# Altium PCB clock-temp-touch.PcbDoc
Units mm, origin at the board's own origin, x right, y up, seen from the top; angles counter-clockwise.
Board outline 151 x 86.38 mm, 2 copper layers (Top Layer, Bottom Layer); 57 components, 33 nets, 157 pads, 0 vias.
Unrouted connection lines stored in the file: 42.
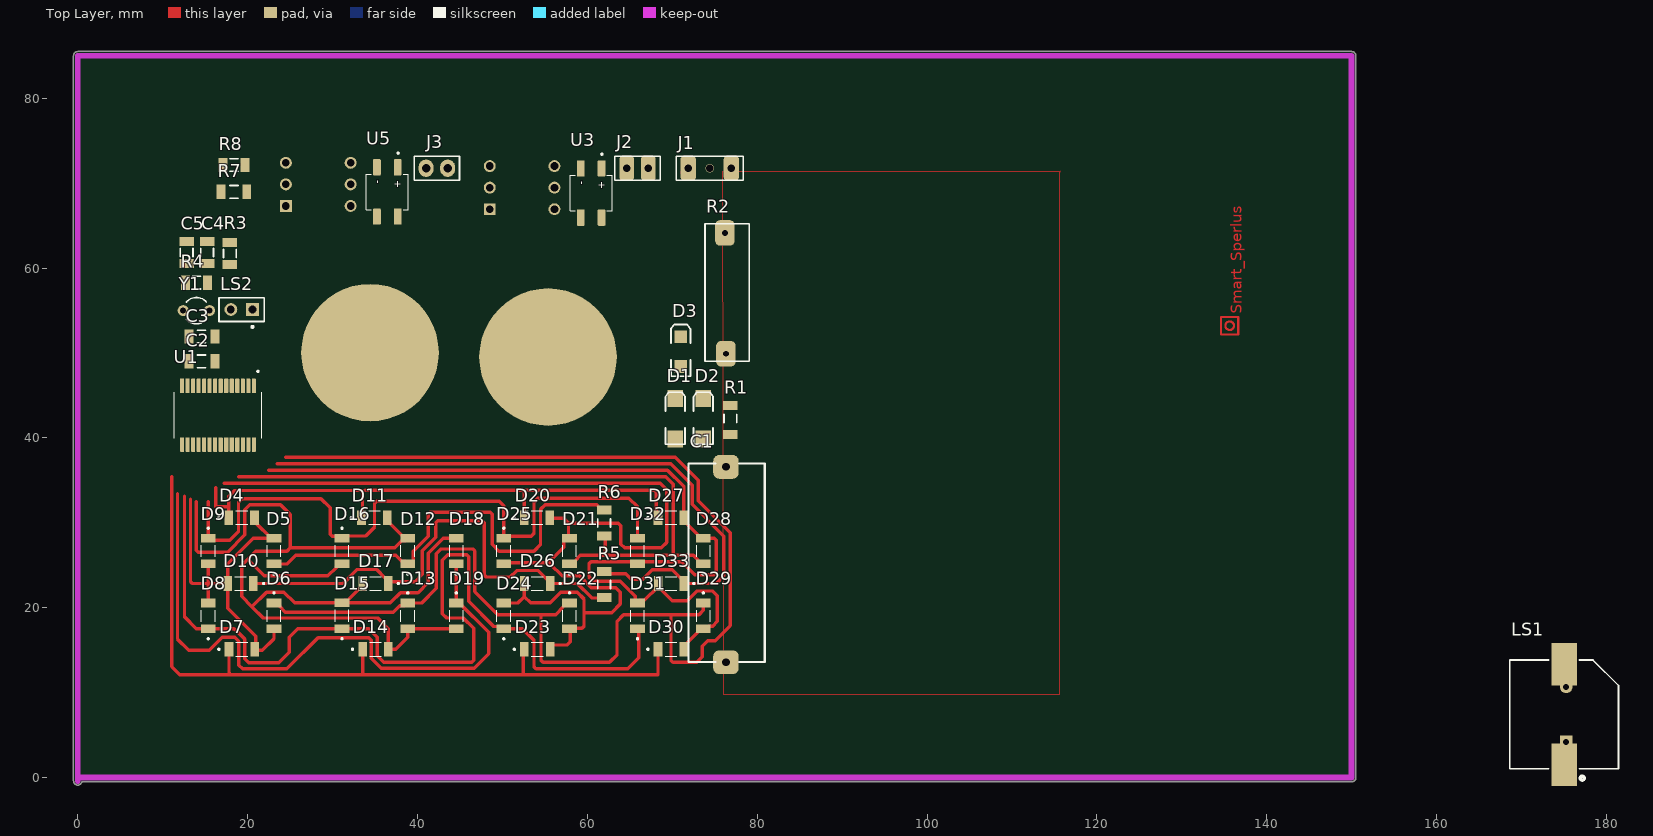
[diagram p0: Top Layer view]
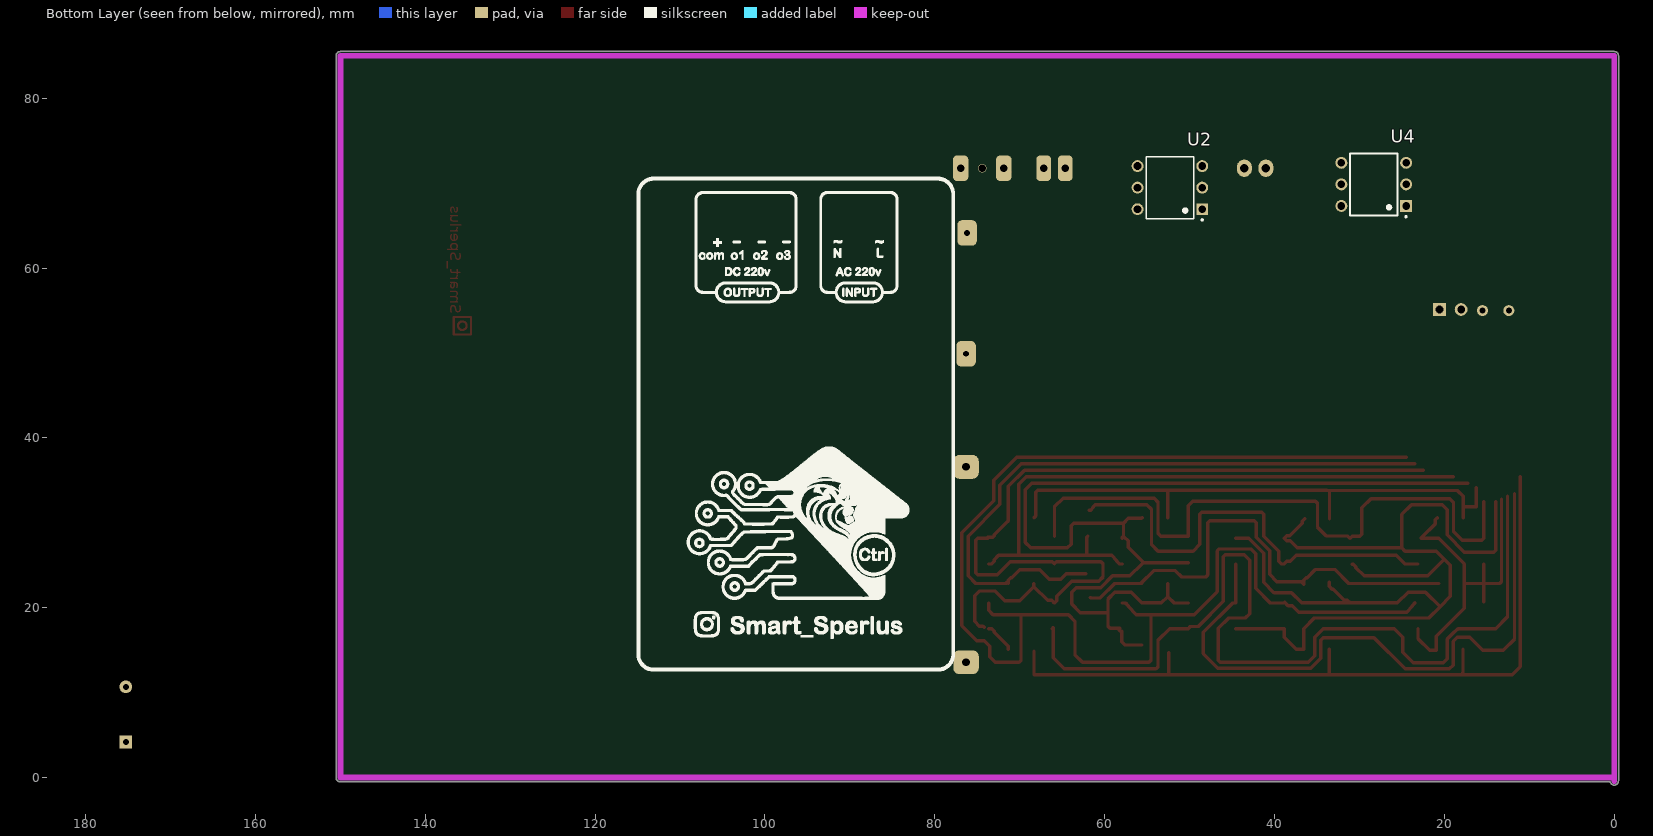
[diagram p1: Bottom Layer view, seen from below]

## Layer stack, top to bottom
Top Solder: solder mask 0.0102, Solder Resist, Dk 3.5
Top Layer: signal copper 0.0356
Dielectric 1: dielectric 0.32, FR-4, Dk 4.8
Bottom Layer: signal copper 0.0356
Bottom Solder: solder mask 0.0102, Solder Resist, Dk 3.5

## Board outline
-0.5,-0.381 -0.5,85 cw(c0,85) 0,85.5 150,85.5 cw(c150,85) 150.5,85 150.5,0 cw(c150,0) 150,-0.5 0.486,-0.5 cw(c0,-0.381)

## Design rules (kind name [scope] priority, off if disabled: settings)
Clearance Clearance_1 [InPolygon] p1: gap=0.3 ignorepadtopadclearanceinfootprint=FALSE
Clearance [All] p2: gap=0.3 ignorepadtopadclearanceinfootprint=FALSE
PolygonConnect [All] p1: connectstyle=Relief reliefconductorwidth=0.254 reliefentries=4 polygonreliefangle="90 Angle" airgapwidth=0.254
RoomDefinition clock-temp-touch [InComponentClass('clock-temp-touch')] p1: confinementstyle=ConfineIn formatcopy=TRUE lockcomponents=FALSE outline 144.907,-4.953 247.904,-4.953 247.904,23.114 144.907,23.114
RoutingLayers [All] p1: top layer_v5=FALSE bottom layer_v5=TRUE
RoutingVias [All] p1: holewidth=0.711 width=2.5 viastyle="Through Hole" minholewidth=0.711 minwidth=1.27 maxholewidth=0.711 maxwidth=2
SolderMaskExpansion [All] p1: expansion=0.102 istentingtop=FALSE
Width [All] p1: maxlimit=3 minlimit=0.3 preferedwidth=1
29 further rules are at their usual default settings.

## Components (designator, comment, footprint, x,y, rotation, side; value= is the part's Value field where it differs from the comment)
C1 "1uf 400v" "1uf 400v" 80.899,12.988 r90 top value=1uF
C2 "=Value" "CAP 1206"#1 14.605,49.022 r180 top
C3 "=Value" "CAP 1206"#1 14.605,51.943 r180 top
C4 "=Value" "CAP 1206"#2 15.24,61.849 r270 top
C5 "=Value" "CAP 1206"#2 12.827,61.849 r270 top
D1 "D Tunnel1" 3.2X1.6X1.1#1 70.358,42.164 r90 top
D2 "D Tunnel1" 3.2X1.6X1.1#1 73.66,42.164 r90 top
D3 "D Tunnel1" 3.2X1.6X1.1#2 70.993,50.165 r90 top
D4 "LHN974_RED_LED_1206" LEDC3216X120N 19.304,30.607 r0 top
D5 "LHN974_RED_LED_1206" LEDC3216X120N 23.114,26.67 r90 top
D6 "LHN974_RED_LED_1206" LEDC3216X120N 23.114,19.05 r270 top
D7 "LHN974_RED_LED_1206" LEDC3216X120N 19.318,15.113 r0 top
D8 "LHN974_RED_LED_1206" LEDC3216X120N 15.367,19.05 r90 top
D9 "LHN974_RED_LED_1206" LEDC3216X120N 15.367,26.67 r270 top
D10 "LHN974_RED_LED_1206" LEDC3216X120N 19.177,22.86 r180 top
D11 "LHN974_RED_LED_1206" LEDC3216X120N 34.925,30.607 r0 top
D12 "LHN974_RED_LED_1206" LEDC3216X120N 38.862,26.67 r90 top
D13 "LHN974_RED_LED_1206" LEDC3216X120N 38.862,19.05 r270 top
D14 "LHN974_RED_LED_1206" LEDC3216X120N 35.052,15.113 r0 top
D15 "LHN974_RED_LED_1206" LEDC3216X120N 31.115,19.064 r90 top
D16 "LHN974_RED_LED_1206" LEDC3216X120N 31.115,26.67 r270 top
D17 "LHN974_RED_LED_1206" LEDC3216X120N 35.052,22.86 r180 top
D18 "LHN974_RED_LED_1206" LEDC3216X120N 44.577,26.67 r90 top
D19 "LHN974_RED_LED_1206" LEDC3216X120N 44.577,19.05 r270 top
D20 "LHN974_RED_LED_1206" LEDC3216X120N 54.088,30.607 r0 top
D21 "LHN974_RED_LED_1206" LEDC3216X120N 57.912,26.67 r90 top
D22 "LHN974_RED_LED_1206" LEDC3216X120N 57.912,19.05 r270 top
D23 "LHN974_RED_LED_1206" LEDC3216X120N 54.102,15.113 r0 top
D24 "LHN974_RED_LED_1206" LEDC3216X120N 50.165,19.05 r90 top
D25 "LHN974_RED_LED_1206" LEDC3216X120N 50.165,26.67 r270 top
D26 "LHN974_RED_LED_1206" LEDC3216X120N 54.102,22.86 r180 top
D27 "LHN974_RED_LED_1206" LEDC3216X120N 69.836,30.607 r0 top
D28 "LHN974_RED_LED_1206" LEDC3216X120N 73.66,26.67 r90 top
D29 "LHN974_RED_LED_1206" LEDC3216X120N 73.66,19.05 r270 top
D30 "LHN974_RED_LED_1206" LEDC3216X120N 69.836,15.113 r0 top
D31 "LHN974_RED_LED_1206" LEDC3216X120N 65.913,19.05 r90 top
D32 "LHN974_RED_LED_1206" LEDC3216X120N 65.913,26.67 r270 top
D33 "LHN974_RED_LED_1206" LEDC3216X120N 69.85,22.86 r180 top
J1 "Header3X1" "HEADER 3X1" 71.882,71.755 r0 top
J2 "Header2X1" "Header 2X1"#1 65.913,71.755 r0 top
J3 "Header2X1" "Header 2X1"#2 42.291,71.755 r0 top
LS1 "Buzzer" ABSM-1574 175.02,1.541 r90 top
LS2 "Bell" PIN2 20.574,55.118 r180 top
R1 "10K" "RES 1206 (3216X08L)"#1 76.835,42.291 r270 top
R2 "10K" Res-(2/1) 76.454,66.421 r270 top
R3 "10K" "RES 1206 (3216X08L)"#2 17.907,61.722 r270 top
R4 "10K" "RES 1206 (3216X08L)"#2 13.97,58.293 r0 top
R5 "10K" "RES 1206 (3216X08L)"#3 61.976,22.733 r90 top
R6 "10K" "RES 1206 (3216X08L)"#3 61.976,29.972 r90 top
R7 "10K" "RES 1206 (3216X08L)"#4 18.415,68.961 r180 top
R8 "10K" "RES 1206 (3216X08L)"#2 18.415,72.136 r180 top
U1 "MAX3241ECAI+T" SOP65P777X199-28N 16.51,42.672 r270 top
U2 "K3021P" DIP762W50P254L730H410Q6 52.324,69.469 r0 bottom
U3 "MB6S" SOIC245P670X270-4N 60.452,68.834 r270 top
U4 "K3021P" DIP762W50P254L730H410Q6 28.321,69.85 r0 bottom
U5 "MB6S" SOIC245P670X270-4N 36.449,68.961 r270 top
Y1 "XTAL" R38 13.97,54.991 r90 top

## Footprints (in the part's own frame and the unit in brackets; to place one, negate y for a bottom-side part, rotate by r counter-clockwise, add the part's x,y. Pads: shape width x height; smd on the part's side, far side on the other; paste and mask are expansions set on the pad)
"1uf 400v" [mm] "24*9mm"
  rrect50% 2.8x3 hole 0.9: 1(0.601,4.572) 2(23.601,4.572)
  silkscreen extent 0.63,0 24,9
3.2X1.6X1.1#1 [mm] "SMT LED; 2 Flat Leads"
  rect 2x1.8 smd: 1(-2.296,0) 2(2.504,0)
  silkscreen extent -2.9,-1.15 3.2,1.15
3.2X1.6X1.1#2 [mm] "SMT LED; 2 Flat Leads"
  rect 1.5x1.5 smd: 1(-1.75,0) 2(1.75,0)
  silkscreen extent -2.9,-1.15 3.2,1.15
ABSM-1574 [mm] "Magnetic Transducer Buzzer"
  rect 5x3 smd: 1(0,0) 2(11.8,0)
  rect 1.5x1.5 hole 0.7: 1A(2.65,-0.24)
  round 1.5 hole 0.7: 2A(9.15,-0.24)
  silkscreen extent -1.83,-6.4 12.3,6.4
"CAP 1206"#1 [mm]
  rect 1.05x1.7 smd: 1(-1.533,0) 2(1.517,0)
  silkscreen extent -0.47,-0.75 0.53,0.75, body extent -1.49,-0.77 1.55,0.75, height 0.75
"CAP 1206"#2 [mm]
  rect 1.05x1.7 smd: 1(-1.27,0) 2(1.326,0)
  silkscreen extent -0.47,-0.75 0.53,0.75, body extent -1.49,-0.77 1.55,0.75, height 0.75
DIP762W50P254L730H410Q6 [mm]
  rect 1.4x1.4 hole 0.9: 1(-3.81,2.54)
  round 1.4 hole 0.9: 2(-3.81,0) 3(-3.81,-2.54) 4(3.81,-2.54) 5(3.81,0) 6(3.81,2.54)
  silkscreen extent -3.9,-3.65 2.8,3.9
"Header 2X1"#1 [mm]
  rrect50% 1.7x3 hole 0.9: 1(-1.27,0) 2(1.27,0)
  silkscreen extent -2.67,-1.4 2.67,1.4, body extent -2.54,-1.27 2.54,1.27, height 9.5
"Header 2X1"#2 [mm]
  oval 1.778x2.032 hole 1.016: 1(-1.27,0) 2(1.27,0)
  silkscreen extent -2.67,-1.4 2.67,1.4, body extent -2.54,-1.27 2.54,1.27, height 9.5
"HEADER 3X1" [mm]
  rrect50% 1.8x3 hole 0.9: 1(0,0) 3(5.08,0)
  round 1 hole 0.9: 2(2.54,0)
  silkscreen extent -1.4,-1.4 6.48,1.4, body extent -1.24,-1.27 6.38,1.27, height 8.38
LEDC3216X120N [mm]
  rect 1.01x1.73 smd: NEG(1.51,0) POS(-1.51,0)
  silkscreen extent -2.8,-0.8 0.68,0.8
PIN2 [mm] "Photosensitive Diode; 2 Leads"
  rect 1.5x1.5 hole 0.9: 1(0,0)
  round 1.5 hole 0.9: 2(2.54,0)
  silkscreen extent -1.4,-1.4 3.94,2.17
R38 [mm] "Crystal, Thru-Hole; 2 Leads; Body 3.1 x 8.2 mm (Dia.xH)"
  round 1.3 hole 0.7: 1(0,1.55) 2(0,-1.55)
  silkscreen extent -1.55,-1.19 1.55,1.17
"RES 1206 (3216X08L)"#1 [mm] "Chip Resistor, 2-Leads, Body 3.2x1.6mm, IPC High Density _ (0.125 W)"
  rect 1.05x1.7 smd: 1(-1.533,0) 2(1.905,0)
  silkscreen extent -0.5,-0.75 0.5,0.75, body extent -1.52,-0.76 1.53,0.76, height 0.6
"RES 1206 (3216X08L)"#2 [mm] "Chip Resistor, 2-Leads, Body 3.2x1.6mm, IPC High Density _ (0.125 W)"
  rect 1.05x1.7 smd: 1(-1.295,0) 2(1.301,0)
  silkscreen extent -0.5,-0.75 0.5,0.75, body extent -1.52,-0.76 1.53,0.76, height 0.6
"RES 1206 (3216X08L)"#3 [mm] "Chip Resistor, 2-Leads, Body 3.2x1.6mm, IPC High Density _ (0.125 W)"
  rect 1.05x1.7 smd: 1(-1.524,0) 2(1.524,0)
  silkscreen extent -0.5,-0.75 0.5,0.75, body extent -1.52,-0.76 1.53,0.76, height 0.6
"RES 1206 (3216X08L)"#4 [mm] "Chip Resistor, 2-Leads, Body 3.2x1.6mm, IPC High Density _ (0.125 W)"
  rect 1.05x1.7 smd: 1(-1.486,0) 2(1.564,0)
  silkscreen extent -0.5,-0.75 0.5,0.75, body extent -1.52,-0.76 1.53,0.76, height 0.6
Res-(2/1) [mm]
  rrect50% 3x2.3 hole 0.7: 1(2.286,-0.254) 2(16.51,-0.127)
  silkscreen extent 1.2,-2.6 17.4,2.6, body extent 1.28,-1.98 17.32,1.92, height 7.03
SOIC245P670X270-4N [mm]
  rrect23% 1.91x0.91 smd: 1(-2.9,1.225) 2(-2.9,-1.225) 3(2.9,-1.225) 4(2.9,1.225)
  silkscreen extent -4.68,-2.48 2.1,2.48
SOP65P777X199-28N [mm]
  rrect25% 1.7x0.48 smd: 1(-3.46,4.225) 2(-3.46,3.575) 3(-3.46,2.925) 4(-3.46,2.275) 5(-3.46,1.625) 6(-3.46,0.975) 7(-3.46,0.325) 8(-3.46,-0.325) 9(-3.46,-0.975) 10(-3.46,-1.625) 11(-3.46,-2.275) 12(-3.46,-2.925) 13(-3.46,-3.575) 14(-3.46,-4.225) 15(3.46,-4.225) 16(3.46,-3.575) 17(3.46,-2.925) 18(3.46,-2.275) 19(3.46,-1.625) 20(3.46,-0.975) 21(3.46,-0.325) 22(3.46,0.325) 23(3.46,0.975) 24(3.46,1.625) 25(3.46,2.275) 26(3.46,2.925) 27(3.46,3.575) 28(3.46,4.225)
  silkscreen extent -5.26,-5.17 2.69,5.17, body extent -3.89,-5.1 3.89,5.1, height 1.99

## Part data
C1: "Capacitor 24*9mm", ComponentLinkURL=www.picpars.com, Designer="Seyed Mohsen Ghasemain"
C2 C3 C4 C5: library part Capacitor, "Capacitor"
D1 D2 D3: "Tunnel Diode - RLC Model", LatestRevisionDate=17-Jul-2002, LatestRevisionNote="Re-released for DXP Platform.", PackageDescription="SM LED; 2 Flat Leads", PackageReference=3.2X1.6X1.1, PackageVersion=Feb-2002, Published=8-Jun-2000, Publisher="Altium Limited"
D4 D5 D6 D7 D8 D9 D10 D11 D12 D13 D14 D15 D16 D17 D18 D19 D20 D21 D22 D23 D24 D25 D26 D27 D28 D29 D30 D31 D32 D33: "2.6 V Red LED SMD", Package=None, Availability="Not in stock", Check_prices=https://www.snapeda.com/parts/LHN974%20RED%20LED%201206/Osram/view-part/7899607/?ref=eda, MF=Osram, MP="LHN974 RED LED 1206", Price=None, SnapEDA_Link=https://www.snapeda.com/parts/LHN974%20RED%20LED%201206/Osram/view-part/7899607/?ref=snap
LS1: "Magnetic Transducer Buzzer", ComponentLink1Description="Manufacturer Link", ComponentLink1URL=http://www.megastar.com/linecard/buzzmode/index.php, DatasheetVersion=17-Dec-2003, LatestRevisionDate=17-Dec-2003, LatestRevisionNote="Schematic revised, PCB Footprint replaced.", PackageDescription="Magnetic Transducer Buzzer", PackageReference=ABSM-1574, Published=24-Mar-1999, Publisher="Altium Limited"
LS2: "Electrical Bell", LatestRevisionDate=17-Jul-2002, LatestRevisionNote="Re-released for DXP Platform.", PackageReference=PIN2, Published=24-Mar-1999, Publisher="Altium Limited"
R1 R2 R3 R4 R5 R6 R7 R8: library part Resistor, "Resistor", Power="1/4 W", Tolerance=5%
U1: "±15kV ESD-Protected, Down to 10nA, 3.0V to 5.5V, Up to 1Mbps, True RS-232 Transceivers", Package="SSOP-28 Maxim", Check_prices=https://www.snapeda.com/parts/MAX3241ECAI+T/Analog+Devices/view-part/?ref=eda, MF="Analog Devices", MP=MAX3241ECAI+T, SnapEDA_Link=https://www.snapeda.com/parts/MAX3241ECAI+T/Analog+Devices/view-part/?ref=snap
U2 U4: "Optoisolator Triac Output 5300Vrms 1 Channel 6-DIP", Package="DIP-6 Vishay", Availability=Unavailable, DigiKey-Purchase-URL=https://snapeda.com/shop?store=DigiKey&id=291595, MF="Vishay Semiconductor", Mouser-Purchase-URL=https://snapeda.com/shop?store=Mouser&id=291595, MP=K3021P, Price=None, SnapEDA_Link=https://www.snapeda.com/parts/K3021P/Vishay%20Semiconductor%20Opto%20Division/view-part/291595/?ref=snap
U3 U5: "Bridge Rectifier Single Phase Standard 600V Surface Mount 4-SOIC", Package="BESOP-4 Surge Components", Digi-Key_Part_Number=MB6SCT-ND, Digi-Key_Purchase_URL=https://www.digikey.com.tr/product-detail/en/on-semiconductor/MB6S/MB6SCT-ND/965654?utm_source=snapeda&utm_medium=aggregator&utm_campaign=symbol, MF="ON Semiconductor", MP=MB6S, SnapEDA_Link=https://www.snapeda.com/parts/MB6S/ON%20Semiconductor/view-part/2774209/?ref=snap
Y1: "Crystal Oscillator", LatestRevisionDate=17-Jul-2002, LatestRevisionNote="Re-released for DXP Platform.", PackageDescription="Crystal, Thru-Hole; 2 Leads; Body 3.1 x 8.2 mm (Dia.xH)", PackageReference=R38, Published=8-Jun-2000, Publisher="Altium Limited"

## Free pads (board coordinates)
  round 16.2 smd: 10(34.417,50.038) 10(55.372,49.53)

## Nets (pads, with @x,y where several pads share a name; then routed paths per layer and width w, separated by ;. In a path a pad name is that pad's centre, name@x,y a point inside that pad or via, vN(x,y) a via of type N, cw(c..) or ccw(c..) an arc to the next point about the centre after c; other vN are vias at no path point)
adc: LS2.2 R3.2 U1.8
dot: D18.POS D19.POS | length 75.4
  Top Layer w0.4: 11.749,33.454 11.749,16.318 13.081,14.986 15.494,14.986 17.018,16.51 18.488,16.51 18.966,16.032 18.966,13.253 19.411,12.807 24.618,12.807 28.289,16.478 34.254,16.478 34.547,16.185 34.547,14.061 35.719,12.889 46.665,12.889 48.387,14.611 48.387,17.11 44.937,20.56 D19.POS D18.POS
GND: C2.2 C3.2 C4.1 C5.1 D1.1 D3.1 R3.1 U1.12 U2.2 U4.2
l1: D4.POS D11.POS D20.POS D27.POS | length 66.7
  Top Layer w0.4: 16.256,34.163 16.256,31.877 16.261,31.872 17.794,31.872 ; D4.POS 17.794,31.872 ; D11.POS@33.528,30.489 33.528,33.811 ; D20.POS 52.578,33.811 ; 52.578,33.85 52.539,33.85 ; D27.POS 68.125,30.808 68.125,33.616 67.891,33.85 52.539,33.85 ; 17.794,31.872 17.794,33.138 18.468,33.811 33.528,33.811 ; 33.528,33.811 33.808,33.811 33.847,33.85 52.539,33.85
l2: D5.POS D12.POS D21.POS D28.POS R6.1 R6.2 | length 132.3
  Top Layer w0.4: 18.923,35.433 69.215,35.433 70.104,34.544 70.104,26.165 ; D5.POS 24.652,25.16 25.654,26.162 30.04,26.162 30.043,26.165 32.187,26.165 32.19,26.162 37.465,26.162 38.162,25.465 38.557,25.465 D12.POS 39.222,25.16 39.527,25.465 39.527,26.642 41.284,28.399 41.284,31.008 41.519,31.242 48.566,31.242 48.8,31.008 48.8,27.468 49.598,26.67 53.721,26.67 54.483,27.432 54.483,31.569 55.045,32.131 61.092,32.131 61.326,31.897 61.326,31.821 61.651,31.496 R6.2@61.849,31.496 ; D21.POS 58.272,25.16 58.577,25.465 58.577,25.557 59.185,26.165 62.103,26.165 ; R6.1 62.103,28.321 62.103,26.165 ; D28.POS 73.3,25.16 72.995,25.465 72.995,25.674 72.504,26.165 70.104,26.165 ; 62.103,26.165 70.104,26.165
L3: D6.POS D13.POS D22.POS D29.POS | length 160.6
  Top Layer w0.4: D6.POS@23.46,20.574 23.779,20.255 23.779,20.163 24.446,19.496 37.149,19.496 37.908,20.255 38.416,20.255 D13.POS@38.791,20.63 ; 24.511,37.719 70.358,37.719 73.057,35.02 73.057,32.607 76.835,28.829 76.835,17.907 75.057,16.129 74.168,16.129 73.533,15.494 73.533,14.224 72.898,13.589 70.084,13.589 69.85,13.823 69.85,19.177 ; D13.POS 40.499,20.56 42.226,22.287 42.226,26.371 42.779,26.924 46.502,26.924 46.736,26.69 46.736,21.912 49.471,19.177 53.405,19.177 54.548,19.177 ; D22.POS 57.552,20.56 57.247,20.255 57.247,20.163 56.261,19.177 54.548,19.177 ; D29.POS 73.66,19.685 73.152,19.177 69.85,19.177 ; 54.548,19.177 54.548,13.823 54.782,13.589 62.611,13.589 63.5,14.478 63.5,18.415 64.262,19.177 69.85,19.177
L4: D7.POS D14.POS D23.POS D30.POS | length 91.5
  Top Layer w0.4: 11.049,35.433 11.049,13.081 12.023,12.107 18.042,12.107 ; D7.POS 17.808,12.342 18.042,12.107 ; D14.POS 33.542,12.107 ; D23.POS@52.451,14.713 52.451,12.107 ; D30.POS@68.326,14.859 68.326,12.107 52.451,12.107 ; 18.042,12.107 33.542,12.107 ; 33.542,12.107 52.451,12.107
L5: D8.POS D15.POS D24.POS D31.POS | length 110.2
  Top Layer w0.4: 12.573,33.147 12.573,18.923 13.956,17.54 D8.POS 18.401,17.54 18.763,17.178 18.81,17.178 19.666,16.322 19.666,13.989 20.148,13.507 23.667,13.507 24.903,14.743 24.903,16.521 25.922,17.54 31.115,17.54 34.25,17.54 35.247,16.543 35.247,14.351 36.009,13.589 46.375,13.589 46.609,13.823 46.609,17.585 45.398,18.796 43.434,18.796 42.926,19.304 42.926,25.609 43.541,26.224 45.802,26.224 46.036,25.99 46.036,20.766 49.004,17.798 49.907,17.798 D24.POS 52.355,17.54 53.721,16.174 53.721,13.061 53.955,12.827 64.77,12.827 66.04,14.097 66.04,17.681 D31.POS@66.181,17.54
L6: D9.POS D16.POS D25.POS D32.POS | length 77.8
  Top Layer w0.4: 15.367,32.512 D9.POS 15.607,27.94 17.907,27.94 18.923,28.956 18.923,32.385 19.369,32.831 28.641,32.831 29.718,31.754 29.718,28.67 29.952,28.436 30.859,28.436 D16.POS 31.383,28.448 33.884,28.448 34.943,29.507 34.943,32.297 35.177,32.532 49.637,32.532 50.165,32.004 50.165,28.434 53.392,28.434 53.721,28.763 53.721,32.438 54.176,32.893 64.897,32.893 65.913,31.877 D32.POS@65.913,28.434
L7: D10.POS D17.POS D26.POS D33.POS R5.1 R5.2 | length 134.4
  Top Layer w0.4: D10.POS 31.242,22.86 32.893,24.511 35.179,24.511 36.165,23.525 36.257,23.525 36.562,23.22 D17.POS 36.562,22.777 36.867,23.082 39.719,23.082 40.575,23.938 40.575,26.7 42.164,28.289 42.164,29.992 42.398,30.226 47.645,30.226 47.879,29.992 47.879,23.856 48.113,23.622 50.927,23.622 51.689,24.384 54.215,24.384 D26.POS@55.739,22.86 ; 23.495,36.957 69.85,36.957 72.357,34.45 72.357,32.164 76.073,28.448 76.073,23.749 75.184,22.86 71.665,22.86 D33.POS@71.55,22.975 ; D26.POS D26.POS@55.739,22.86 ; R5.1@61.722,21.209 61.668,21.155 60.506,21.155 58.801,22.86 D26.POS@55.739,22.86 ; R5.2@62.23,24.003 64.516,24.003 65.151,23.368 66.548,23.368 67.668,24.488 70,24.488 70.963,23.525 71.055,23.525 71.36,23.22 71.36,22.975 D33.POS
NetC1_2: C1.2 D1.2 D2.1 R1.2
NetC4_2: C4.2 R4.2 U1.10 Y1.2
NetC5_2: C5.2 R4.1 U1.11 Y1.1
NetJ2_1: J2.1 U3.2
NetJ2_2: J2.2 U3.1
NetJ3_1: J3.1 U5.2
NetJ3_2: J3.2 U5.1
NetLS1_1: LS1.1 LS1.1A
NetLS1_2: LS1.2 LS1.2A
NetR7_1: R7.1 U2.1
NetR8_1: R8.1 U4.1
NetU2_4: U2.4 U3.3
NetU4_4: U4.4 U5.3
nol: C1.1 J1.3 R1.1 U3.4 U5.4
out1: R7.2
out2: R8.2
R1: D27.NEG D28.NEG D29.NEG D30.NEG D31.NEG D32.NEG D33.NEG | length 107.2
  Top Layer w0.4: 22.479,36.195 69.443,36.195 71.346,34.292 D27.NEG ; D33.NEG D33.NEG@68.34,22.5 ; D30.NEG 71.346,15.473 72.995,17.122 72.995,17.235 73.3,17.54 D29.NEG ; D27.NEG@71.374,30.607 71.374,30.219 71.651,29.942 71.658,29.942 72.995,28.605 72.995,28.485 73.173,28.307 D28.NEG@73.787,28.307 ; D28.NEG@73.787,28.194 74.95,28.194 75.184,27.96 75.184,24.11 74.95,23.876 72.644,23.876 71.12,25.4 66.153,25.4 D32.NEG 65.673,25.4 60.432,25.4 60.198,25.166 60.198,23.622 60.706,23.114 63.881,23.114 65.659,21.336 65.659,20.814 D31.NEG 66.218,20.865 66.705,20.865 D33.NEG@68.34,22.5 ; D29.NEG@74.188,17.708 74.325,17.845 74.769,17.845 75.311,18.387 75.311,21.429 74.769,21.971 72.898,21.971 71.755,20.828 69.977,20.828 68.645,22.16 68.645,22.195 68.375,22.465 68.34,22.465 D33.NEG@68.34,22.5
R2: D20.NEG D21.NEG D22.NEG D23.NEG D24.NEG D25.NEG D26.NEG | length 124
  Top Layer w0.4: 17.272,34.671 68.58,34.671 69.342,33.909 69.342,27.686 68.707,27.051 64.389,27.051 63.937,27.503 63.937,29.662 63.627,29.972 57.785,29.972 ; D24.NEG 51.836,20.56 52.592,21.316 ; D25.NEG@50.165,25.287 55.386,25.287 ; D26.NEG 52.592,21.316 ; D20.NEG 55.679,30.526 57.231,30.526 57.785,29.972 ; D23.NEG@55.612,15.621 57.648,15.621 58.009,15.982 58.009,17.235 58.136,17.235 D22.NEG@58.314,17.413 ; 55.632,25.14 55.485,25.287 55.386,25.287 ; 55.66,25.112 57.023,23.749 59.081,23.749 60.478,22.352 63.373,22.352 63.881,21.844 63.881,20.447 62.865,19.431 59.611,19.431 ; D21.NEG D21.NEG@57.785,28.307 ; D21.NEG@57.912,28.307 D21.NEG@57.785,28.307 ; D22.NEG@58.214,17.574 59.377,17.574 59.611,17.808 59.611,19.431 ; 52.592,21.316 53.334,20.574 55.626,20.574 56.896,21.844 58.801,21.844 59.611,21.034 59.611,19.431 ; 55.386,25.287 57.247,27.148 57.247,27.875 57.679,28.307 D21.NEG@57.785,28.307 ; D21.NEG@57.785,28.307 57.785,29.972
R3: D11.NEG D12.NEG D13.NEG D14.NEG D15.NEG D16.NEG D17.NEG D18.NEG D19.NEG | length 130.8
  Top Layer w0.4: 13.973,32.512 13.973,26.777 14.207,26.543 17.653,26.543 19.685,28.575 19.685,29.337 19.682,29.34 19.682,31.552 20.261,32.131 23.876,32.131 25.019,30.988 25.019,27.051 ; D16.NEG@30.861,25.146 30.741,25.146 30.45,24.855 30.45,24.735 29.464,23.749 21.971,23.749 20.002,25.717 ; D17.NEG@33.551,22.987 33.551,22.509 33.237,22.195 33.096,22.195 31.78,20.879 31.42,20.879 D15.NEG ; D11.NEG@36.435,30.48 36.74,30.175 36.74,29.935 38.19,28.485 38.557,28.485 D12.NEG 38.557,27.875 38.162,27.875 37.338,27.051 25.019,27.051 ; D19.NEG D13.NEG 38.862,16.51 37.465,15.113 D14.NEG 36.576,15.127 36.576,17.526 35.306,18.796 21.844,18.796 20.511,20.13 ; D18.NEG 43.045,28.18 41.275,26.41 41.275,22.987 40.069,21.78 38.005,21.78 36.799,20.574 D15.NEG ; 20.002,25.717 19.304,25.019 19.304,21.336 20.511,20.13 ; 20.002,25.717 20.955,26.67 24.638,26.67 25.019,27.051 ; 20.511,20.13 22.225,21.844 24.257,21.844 25.527,20.574 D15.NEG
R4: D4.NEG D5.NEG D6.NEG D7.NEG D8.NEG D9.NEG D10.NEG | length 43.6
  Top Layer w0.4: 13.273,32.766 13.273,23.094 13.507,22.86 15.367,22.86 17.653,22.86 17.653,19.939 20.941,16.651 20.941,14.986 21.717,14.986 23.114,16.383 23.114,17.286 D6.NEG ; D8.NEG@15.367,20.687 15.367,22.924 D9.NEG ; D10.NEG 17.667,25.16 20.687,28.18 22.754,28.18 22.642,28.292 21.069,29.865 21.069,30.352 D4.NEG
vcc: C2.1 C3.1 D2.2 D3.2 LS2.1 R2.2
vcm: U1.9
vdd: J1.1 R2.1 U2.6 U4.6 | length 0.7
  Top Layer w1: J1.1@71.482,71.261 71.882,71.661 J1.1
pads on no net: J1.2 U1.1 U1.2 U1.3 U1.4 U1.5 U1.6 U1.7 U1.13 U1.14 U1.15 U1.16 U1.17 U1.18 U1.19 U1.20 U1.21 U1.22 U1.23 U1.24 U1.25 U1.26 U1.27 U1.28 U2.3 U2.5 U4.3 U4.5
copper on no net: | length 11.3
  Top Layer w0.254: 134.62,52.197 136.652,52.197 136.652,54.229 134.62,54.229 134.62,52.197 ; 136.144,53.213 ccw(c135.636,53.213) 136.144,53.213

## Polygon pours and split planes (outlines as drawn)
GND on Top Layer "NONET_L01_P024" (hatched 90Degree grid 0.5 track 0.2, shelved, pour order 24): 75.946,71.374 115.697,71.374 115.57,71.247 115.57,9.779 76.073,9.779

## Keep-outs
Keep-Out Layer:
  lines w0.7: 0,-0.381 0,85 150,85 150,0 0,0

## Other copper
Top Layer:
  text "Smart_Sperlus" at 137.033,54.61 h1.3 r90

## Silkscreen, mask and mechanical layers (free items; w line width, h text height)
Bottom Overlay:
  drawing of 14186 lines, arcs and shapes, not listed
Top Solder:
  lines w0.254: 111.633,46.736 114.173,46.736 114.173,66.294 111.633,66.294 111.633,46.736
Bottom Solder:
  lines w0.2: 9.779,10.414 9.779,75.311 80.137,75.311 80.137,10.414 9.779,10.414
Mechanical 4:
  rectangle: 58.039,43.149 64.039,49.149
  rectangle: 50.134,50.896 56.134,56.896
  rectangle: 42.291,43.149 48.291,49.149
  rectangle: 34.386,50.896 40.386,56.896
  rectangle: 26.543,43.149 32.543,49.149
  rectangle: 18.638,50.896 24.638,56.896
  rectangle: 10.764,43.149 16.764,49.149
  rectangle: 26.543,50.896 32.543,56.896
  rectangle: 42.291,50.896 48.291,56.896
  rectangle: 58.039,50.896 64.039,56.896
  rectangle: 10.795,50.896 16.795,56.896

## Text inside footprints (layer, text, board x,y; h text height)
U3: Top Overlay "+" at 61.342,70.233 h0.81 r270; Top Overlay "-" at 59.052,70.234 h0.81 r270
U5: Top Overlay "-" at 35.049,70.361 h0.81 r270; Top Overlay "+" at 37.339,70.36 h0.81 r270